# Altium PCB usbtinyisp.PcbDoc
Units mm, origin at the board's own origin, x right, y up, seen from the top; angles counter-clockwise.
Board outline 75 x 45 mm, 2 copper layers (Top Layer, Bottom Layer); 30 components, 29 nets, 117 pads, 13 vias.
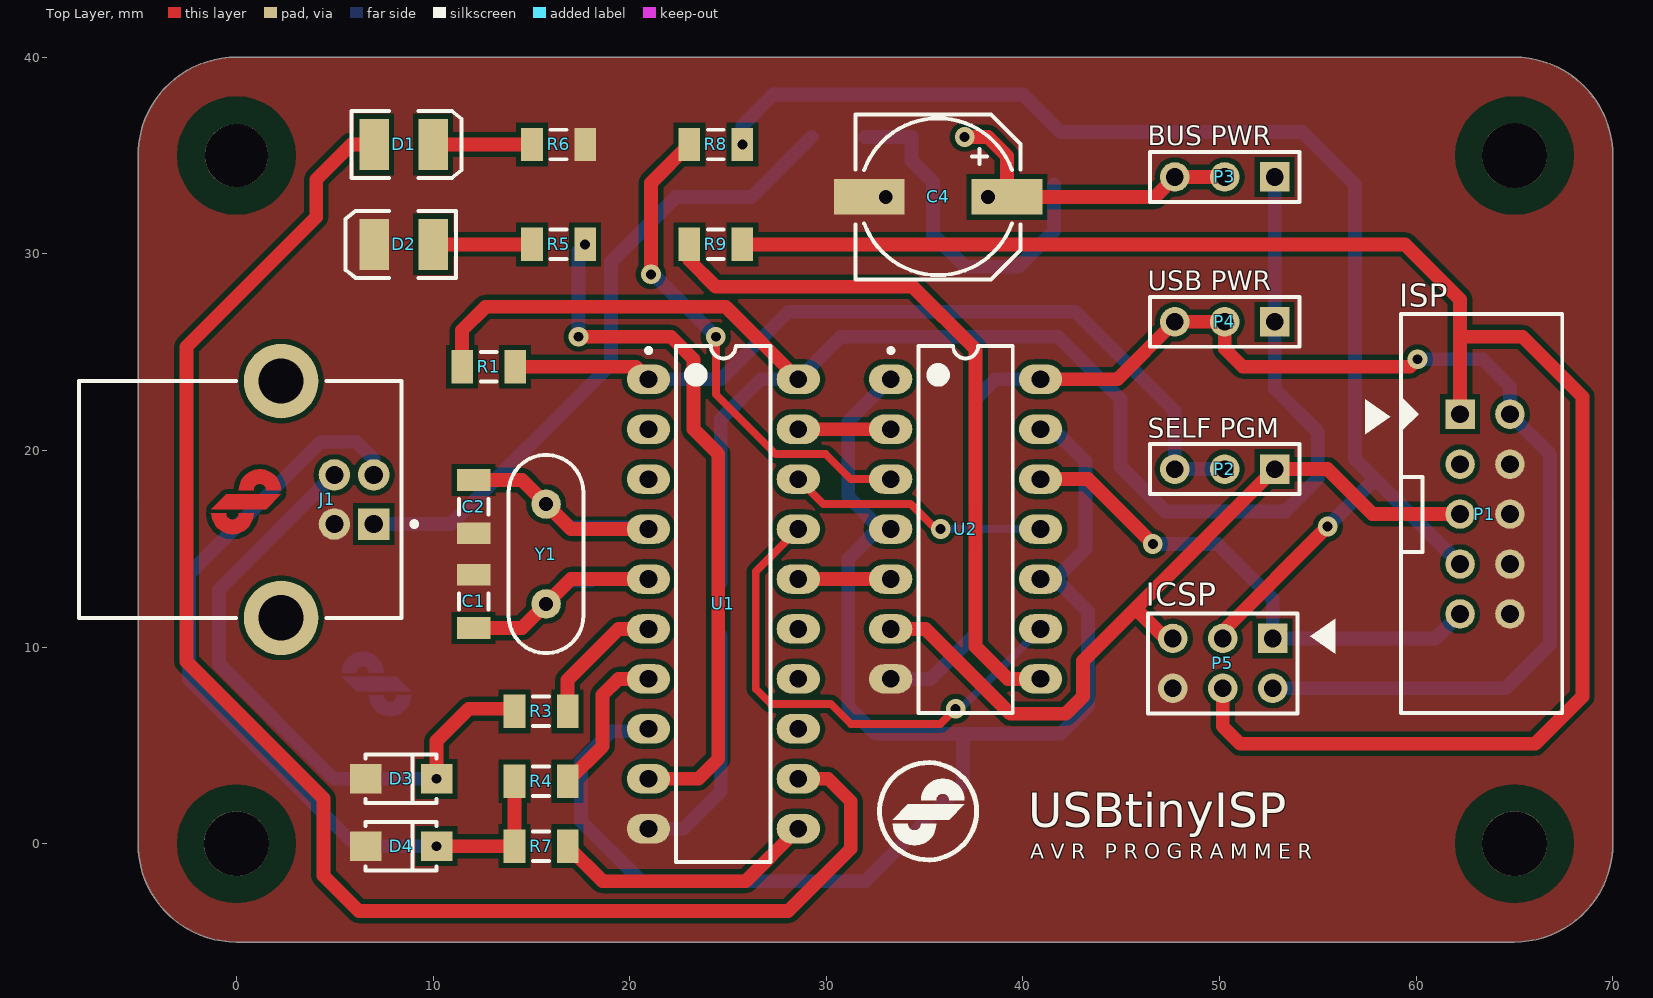
[diagram p0: Top Layer view]
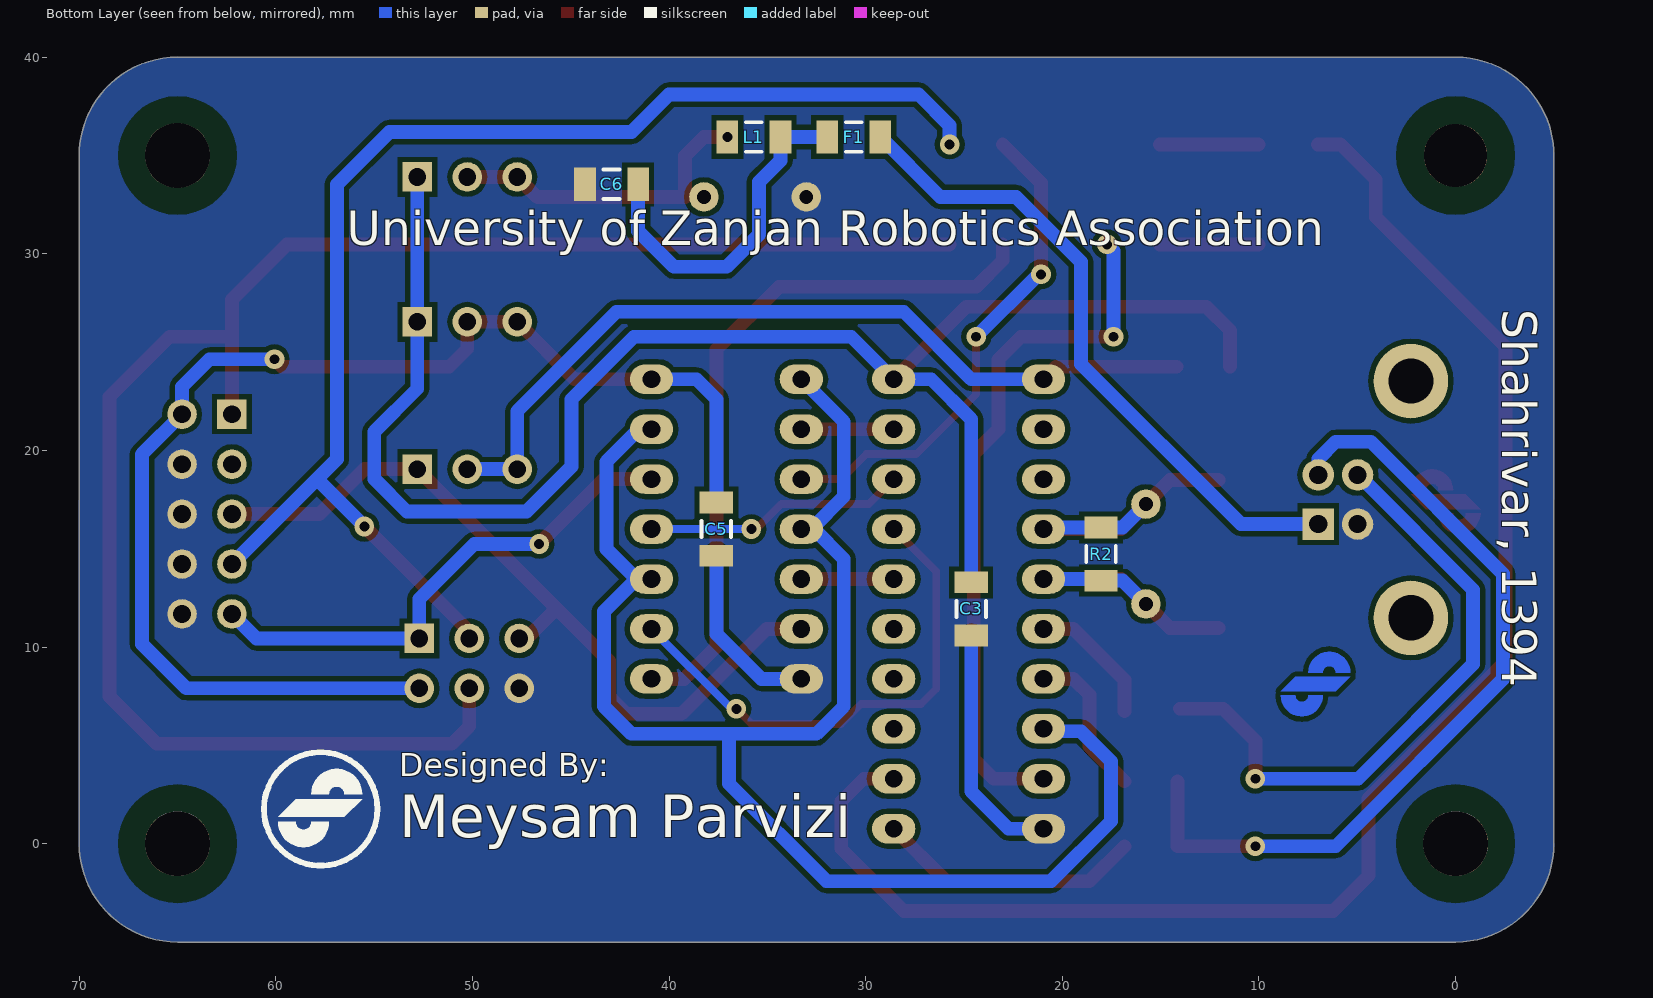
[diagram p1: Bottom Layer view, seen from below]

## Layer stack, top to bottom
Top Solder: solder mask 0.0102, Solder Resist, Dk 3.5
Top Layer: signal copper 0.0356
Dielectric 1: dielectric 0.32, FR-4, Dk 4.8
Bottom Layer: signal copper 0.0356
Bottom Solder: solder mask 0.0102, Solder Resist, Dk 3.5

## Board outline
-5,0 -5,35 cw(c0,35) 0,40 65,40 cw(c65,35) 70,35 70,0 cw(c65,0) 65,-5 0,-5 cw(c0,0)

## Design rules (kind name [scope] priority, off if disabled: settings)
Clearance [All] p1: gap=0.254
PolygonConnect [All] p1: connectstyle=Direct reliefconductorwidth=0.254 reliefentries=4 polygonreliefangle="90 Angle" airgapwidth=0.254
RoutingVias [All] p1: holewidth=0.711 width=1.27 viastyle="Through Hole" minholewidth=0.711 minwidth=1.27 maxholewidth=0.711 maxwidth=1.27
SolderMaskExpansion [All] p1: expansion=0.102
Width [All] p1: maxlimit=1 minlimit=0.254 preferedwidth=0.7 minimp=50.000000 maximp=50.000000 favimp=50.000000
30 further rules are at their usual default settings.

## Components (designator, comment, footprint, x,y, rotation, side; value= is the part's Value field where it differs from the comment)
C1 "Cap" C1206 12.065,12.319 r270 top
C2 "Cap" C1206 12.065,17.145 r90 top
C3 "Cap" C1206 24.638,11.938 r90 bottom
C4 "Cap Pol1" CAP-SMD1 35.687,32.893 r0 top
C5 "Cap" C1206 37.592,16.002 r90 bottom
C6 "Cap" C1206 42.926,33.528 r180 bottom
D1 "LED" 3.5X2.8X1.9 8.509,35.56 r0 top
D2 "LED" 3.5X2.8X1.9 8.509,30.48 r180 top
D3 "3.6v" DIODE-S 8.382,3.302 r0 top
D4 "3.6v" DIODE-S 8.382,-0.127 r0 top
F1 "Fuse 1" C1206 30.607,35.941 r180 bottom
J1 "440119-1" 440119 5.985,17.506 r180 top
L1 "Inductor" C1206 35.687,35.941 r180 bottom
P1 "ISP" BOX2X5 62.23,21.844 r270 top
P2 "Self Prog" HDR1X3 52.805,19.05 r180 top
P3 "Bus Power" HDR1X3 52.805,33.909 r180 top
P4 "USB Power" HDR1X3 52.805,26.543 r180 top
P5 "Header 3X2" HDR2X3 52.705,10.441 r180 top
R1 "Res1" C1206 12.827,24.257 r180 top
R2 "Res1" C1206 18.034,14.732 r270 bottom
R3 "Res1" C1206 15.494,6.731 r0 top
R4 "Res1" C1206 15.494,3.175 r0 top
R5 "Res1" C1206 16.383,30.48 r180 top
R6 "Res1" C1206 16.383,35.56 r0 top
R7 "Res1" C1206 15.494,-0.127 r0 top
R8 "Res1" C1206 24.384,35.56 r0 top
R9 "Res1" C1206 24.384,30.48 r0 top
U1 "ATtiny2313V-10PU" DIP20 24.765,21.082 r270 top
U2 "SN74AHC125N" DIP14 37.084,21.082 r270 top
Y1 "XTAL" XTAL 15.748,14.732 r90 top

## Footprints (in the part's own frame and the unit in brackets; to place one, negate y for a bottom-side part, rotate by r counter-clockwise, add the part's x,y. Pads: shape width x height; smd on the part's side, far side on the other; paste and mask are expansions set on the pad)
3.5X2.8X1.9 [mm] "SM LED; 2 C-Bend Leads; Body 3.5 x 2.8 x 1.9 mm, inc leads (LxWxH typ)"
  rect 1.5x2.6 smd: 1(-1.5,0) 2(1.5,0)
  silkscreen extent -2.65,-1.7 2.95,1.7
440119 [mm] "Connector; USB1.1, Type B, Thru-Hole; 4 Position; Right Angle"
  rect 1.6x1.6 hole 0.92: 1(-1,1.25)
  round 1.6 hole 0.92: 2(-1,-1.25) 3(1,-1.25) 4(1,1.25)
  round 3.8 hole 2.3: 5(3.71,6.02) 6(3.71,-6.02)
  silkscreen extent -3.18,-6.02 13.99,6.02
BOX2X5 [mm] "Box Header; 5x2 Position"
  rect 1.5x1.5 hole 0.9: 1(0,0)
  round 1.5 hole 0.9: 2(0,2.54) 3(2.54,0) 4(2.54,2.54) 5(5.08,0) 6(5.08,2.54) 7(7.62,0) 8(7.62,2.54) 9(10.16,0) 10(10.16,2.54)
  silkscreen extent -5.1,-3 15.2,5.2, body extent -5.1,-3 15.2,5.2, height 9
C1206 [mm] "Chip Capacitor, Body 3.2x1.6mm, IPC High Density"
  rect 1.1x1.7 smd: 1(-1.35,0) 2(1.35,0)
  silkscreen extent -0.4,-0.75 0.4,0.75, body extent -1.7,-0.9 1.7,0.9, height 1.3
CAP-SMD1 [mm] "SMD Electrolyte Capacitor; 2 Leads; 100uF; 25V"
  rect 3.6x1.8 smd: 1(3.5,0) 2(-3.5,0)
  silkscreen extent -4.2,-4.2 4.2,4.2
DIODE-S [mm] "SOD-123; 2 Leads; Body 2.7 x 1.6 mm, (LxW)"
  rect 1.6x1.5 smd: 1(-1.8,0) 2(1.8,0)
  silkscreen extent -1.81,-1.23 1.81,1.23
DIP14 [mm] "DIP; 14 Leads; Row Spacing 7.62 mm; Pitch 2.54 mm"
  oval 1.5x2.2 hole 0.9: 1(-2.54,-3.81) 2(0,-3.81) 3(2.54,-3.81) 4(5.08,-3.81) 5(7.62,-3.81) 6(10.16,-3.81) 7(12.7,-3.81) 8(12.7,3.81) 9(10.16,3.81) 10(7.62,3.81) 11(5.08,3.81) 12(2.54,3.81) 13(0,3.81) 14(-2.54,3.81)
  silkscreen extent -4.23,-3.9 14.43,2.4, body extent -4.2,-3.4 14.35,3.4, height 4.5
DIP20 [mm] "DIP; 20 Leads; Row Spacing 7.62 mm; Pitch 2.54 mm"
  oval 1.5x2.2 hole 0.9: 1(-2.54,-3.81) 2(0,-3.81) 3(2.54,-3.81) 4(5.08,-3.81) 5(7.62,-3.81) 6(10.16,-3.81) 7(12.7,-3.81) 8(15.24,-3.81) 9(17.78,-3.81) 10(20.32,-3.81) 11(20.32,3.81) 12(17.78,3.81) 13(15.24,3.81) 14(12.7,3.81) 15(10.16,3.81) 16(7.62,3.81) 17(5.08,3.81) 18(2.54,3.81) 19(0,3.81) 20(-2.54,3.81)
  silkscreen extent -4.23,-3.9 22.02,2.4, body extent -4.2,-3.4 22.05,3.4, height 4.5
HDR1X3 [mm] "Connector; Header; 3 Position"
  rect 1.5x1.5 hole 0.9: 1(0,0)
  round 1.5 hole 0.9: 2(2.54,0) 3(5.08,0)
  silkscreen extent -1.27,-1.27 6.35,1.27
HDR2X3 [mm] "Connector; Header; 3x2 Position"
  rect 1.5x1.5 hole 0.9: 1(0,0)
  round 1.5 hole 0.9: 2(0,2.54) 3(2.54,0) 4(2.54,2.54) 5(5.08,0) 6(5.08,2.54)
  silkscreen extent -1.27,-1.27 6.35,3.81
XTAL [mm] "Crystal, Thru Hole, 2 Leads"
  round 1.5 hole 0.7: 1(-2.54,0) 2(2.54,0)
  silkscreen extent -5.04,-1.91 5.04,1.91

## Part data
C1 C2 C3 C5 C6: "Capacitor"
C4: "Polarized Capacitor (Radial)"
D1 D2: "Typical RED GaAs LED"
D3 D4: library part "D Zener", "Zener Diode"
F1: "Fuse"
J1: "USB 1.1, Right Angle, Thru-Hole, B Type, Receptacle, 4 Position, Beige"
P1: library part "Box 5X2", "Box, 5-Pin, Dual row"
P2 P3 P4: library part "Header 3", "Header, 3-Pin"
P5: "Header, 3-Pin, Dual row"
R1 R2 R3 R4 R5 R6 R7 R8 R9: "Resistor"
U1: "Low Power tinyAVR® 8-Bit Microcontroller, 2K Flash Memory, 10MHz, Industrial Temperature, 20-Lead PDIP, Pb-Free"
U2: "Quadruple Bus Buffer Gate with 3-State Outputs"
Y1: "Crystal Oscillator"

## Free pads (board coordinates)
  round 3.2 hole 3.2: 0(0,0) 0(0,35) 0(65,0)
  round 3.3 hole 3.3: 0(0,0) 0(65,0) 0(65,35)
  round 1.5 hole 0.7: 0(38.227,32.893) 1(33.02,32.893)

## Via types
v1: diameter 1, hole 0.5, Top Layer to Bottom Layer, 13 vias

## Nets (pads, with @x,y where several pads share a name; then routed paths per layer and width w, separated by ;. In a path a pad name is that pad's centre, name@x,y a point inside that pad or via, vN(x,y) a via of type N, cw(c..) or ccw(c..) an arc to the next point about the centre after c; other vN are vias at no path point)
CONTROL: U1.8 U2.1 U2.4 U2.10 U2.13 | length 82
  Bottom Layer w0.7: U1.8 20.828,5.715 19.05,5.715 17.526,4.191 17.526,1.143 20.574,-1.905 32.004,-1.905 36.957,3.048 36.957,5.588 ; U2.4 U2.4@32.766,16.002 ; U2.1 31.115,21.463 31.115,17.653 U2.4@32.766,16.002 ; U2.13 41.529,21.082 43.18,19.431 43.18,14.986 41.656,13.462 43.307,11.811 43.307,6.985 41.91,5.588 36.957,5.588 ; U2.4@32.766,16.002 32.639,16.002 31.115,14.478 31.115,6.985 32.512,5.588 36.957,5.588
GND: C1.1 C2.1 C3.1 C4.2 C5.1 C6.1 D2.2 D3.1 D4.1 J1.4 P1.4 P1.6 P1.8 P1.10 P5.6 pad.1 R6.2 U1.10 U2.7 | length 21.8
  Bottom Layer w0.7: U1.10 22.733,0.762 24.638,2.667 C3.1 ; U2.7 35.306,8.382 37.592,10.668 37.592,14.271 C5.1@37.592,14.779
ISP_VCC: C5.2 P1.2 P4.2 P4.3 P5.2 U2.14 | length 65.4
  Top Layer w0.7: U2.14 44.804,23.622 P4.3 P4.2 50.265,25.173 51.181,24.257 59.69,24.257 v1(60.071,24.638)
  Bottom Layer w0.7: C5.2@37.592,17.479 37.592,22.606 38.608,23.622 U2.14 ; P5.2 64.543,7.901 66.802,10.16 66.802,19.812 P1.2 64.77,23.241 63.373,24.638 v1(60.071,24.638)
MISO: P1.9 P5.1 U2.12 | length 26.4
  Top Layer w0.7: U2.12 43.307,18.542 v1(46.609,15.24)
  Bottom Layer w0.7: v1(46.609,15.24) 49.911,15.24 52.705,12.446 P5.1 60.987,10.441 P1.9
MISO2: U1.18 U2.11 | length 13.4
  Top Layer w0.4: U1.18 29.845,17.272 34.29,17.272 35.56,16.002 v1(35.814,16.002)
  Bottom Layer w0.4: v1(35.814,16.002) U2.11
MOSI: P1.1 P5.4 R9.2 | length 87.8
  Top Layer w0.7: R9.2 59.436,30.48 62.23,27.686 62.23,25.781 ; P5.4 50.165,5.969 51.054,5.08 66.04,5.08 68.453,7.493 68.453,22.733 65.405,25.781 62.23,25.781 ; P1.1 62.23,25.781
MOSI2: U1.17 U2.9 | length 26
  Top Layer w0.4: U1.17 26.416,13.843 26.416,7.874 27.178,7.112 30.226,7.112 31.242,6.096 35.814,6.096 v1(36.576,6.858)
  Bottom Layer w0.4: v1@36.83,6.858 U2.9
NetC1_2: C1.2 R2.2 U1.5 Y1.1 | length 15.5
  Top Layer w0.7: C1.2 14.525,10.969 Y1.1 17.018,13.462 U1.5
  Bottom Layer w0.7: Y1.1 16.938,13.382 R2.2 ; R2.2@18.114,13.462 U1.5
NetC2_2: C2.2 R2.1 U1.4 Y1.2 | length 15.5
  Top Layer w0.7: C2.2 14.525,18.495 Y1.2 17.018,16.002 U1.4
  Bottom Layer w0.7: Y1.2 16.938,16.082 R2.1 U1.4@20.875,16.082
NetC4_1: C4.1 L1.1 P3.2 P3.3 pad.0@38.227,32.893 | length 16.1
  Top Layer w0.7: v1(37.037,35.941) 38.227,35.941 39.187,34.981 C4.1 46.709,32.893 P3.3 P3.2
NetC6_2: C6.2 F1.1 L1.2 | length 17.7
  Bottom Layer w0.7: F1.1 L1.2 34.337,34.751 35.433,33.655 35.433,30.988 37.084,29.337 39.751,29.337 41.576,31.162 C6.2
NetD1_1: D1.1 U1.12 | length 79.1
  Top Layer w0.7: D1.1 5.842,35.56 4.064,33.782 4.064,31.877 -2.54,25.273 -2.54,9.271 4.426,2.305 4.426,-1.632 6.223,-3.429 28.067,-3.429 31.242,-0.254 31.242,2.159 30.099,3.302 U1.12
NetD1_2: D1.2 R6.1 | length 5
  Top Layer w0.7: D1.2 R6.1
NetD2_1: D2.1 R5.2 | length 5
  Top Layer w0.7: D2.1 R5.2
NetD3_2: D3.2 J1.3 R3.1 | length 32
  Top Layer w0.7: v1(10.182,3.302) 10.182,5.229 11.811,6.858 R3.1@14.017,6.858
  Bottom Layer w0.7: J1.3@4.969,18.776 -0.889,12.918 -0.889,9.144 4.953,3.302 v1(10.182,3.302)
NetD4_2: D4.2 J1.2 R4.1 R7.1 | length 42
  Top Layer w0.7: v1(10.182,-0.127) R7.1 R4.1
  Bottom Layer w0.7: J1.2@6.969,18.776 6.969,19.574 6.096,20.447 4.318,20.447 -2.413,13.716 -2.413,8.382 6.096,-0.127 v1(10.182,-0.127)
NetF1_2: F1.2 J1.1 | length 33.5
  Bottom Layer w0.7: J1.1 10.922,16.256 19.05,24.384 19.05,29.591 22.352,32.893 26.209,32.893 F1.2
NetR3_2: R3.2 U1.6 | length 6.8
  Top Layer w0.7: R3.2 16.844,8.335 19.431,10.922 U1.6
NetR4_2: R4.2 U1.7 | length 7.8
  Top Layer w0.7: R4.2 18.622,4.953 18.622,7.573 19.431,8.382 U1.7
NetR5_1: R5.1 U1.9 | length 36
  Top Layer w0.7: v1(17.399,25.781) 22.098,25.781 23.241,24.638 23.241,21.082 24.511,19.812 24.511,4.318 23.495,3.302 U1.9
  Bottom Layer w0.7: v1(17.399,25.781) 17.399,30.146 v1(17.733,30.48)
NetR7_2: R7.2 U1.11 | length 13.6
  Top Layer w0.7: R7.2 18.622,-1.905 25.908,-1.905 U1.11
NetR8_1: R8.1 U2.3 | length 25.6
  Top Layer w0.4: v1(24.384,25.781) 24.384,22.86 27.432,19.812 29.972,19.812 31.242,18.542 U2.3
  Top Layer w0.7: v1(21.082,28.956) 21.082,33.608 R8.1
  Bottom Layer w0.7: v1(21.082,28.956) 21.209,28.956 v1(24.384,25.781)
NetR9_1: R9.1 U2.8 | length 36.3
  Top Layer w0.7: R9.1 23.034,29.671 24.384,28.321 34.417,28.321 37.592,25.146 37.592,10.033 39.243,8.382 U2.8
RESET: P2.2 P2.3 R1.1 U1.1 | length 42.8
  Top Layer w0.7: R1.1 20.32,24.257 U1.1
  Bottom Layer w0.7: U1.1 24.638,23.622 28.067,27.051 42.672,27.051 47.725,21.998 P2.3 P2.2
RST: P1.5 P2.1 P5.5 U2.6 | length 40.6
  Top Layer w0.7: U2.6 35.052,10.922 39.37,6.604 42.164,6.604 43.053,7.493 43.053,9.298 45.72,11.965 ; P5.5@47.625,10.568 P5.5 47.244,10.441 45.72,11.965 ; P1.5 57.785,16.764 55.499,19.05 P2.1 45.72,11.965
RST2: U1.16 U2.5 | length 4.7
  Top Layer w0.7: U1.16 U2.5
SCK: P1.7 P5.3 R8.2 | length 67.5
  Top Layer w0.7: P5.3 50.165,10.795 v1(55.499,16.129)
  Bottom Layer w0.7: v1(25.734,35.56) 25.734,36.529 27.305,38.1 40.005,38.1 41.91,36.195 54.229,36.195 56.896,33.528 56.896,19.558 57.912,18.542 ; v1(55.499,16.129) 57.912,18.542 ; P1.7 57.912,18.542
SCK2: U1.19 U2.2 | length 4.7
  Top Layer w0.7: U1.19 U2.2
VCC: C3.2 P3.1 P4.1 R1.2 U1.20 | length 84
  Top Layer w0.7: R1.2 11.477,26.115 12.667,27.305 24.892,27.305 U1.20
  Bottom Layer w0.7: C3.2 24.638,21.59 26.67,23.622 U1.20 30.734,25.781 41.783,25.781 44.958,22.606 44.958,19.177 47.244,16.891 53.34,16.891 54.991,18.542 54.991,20.955 52.805,23.141 P4.1 P3.1
pads on no net: J1.5 J1.6 P1.3 U1.2 U1.3 U1.13 U1.14 U1.15

## Polygon pours and split planes (outlines as drawn)
GND on Top Layer "Mechanical 1-No Net" (solid, pour order 2): -5,0 -5,35 cw(c0,35) 0,40 65,40 cw(c65,35) 70,35 70,0 cw(c65,0) 65,-5 0,-5 cw(c0,0)
GND on Bottom Layer "Mechanical 1-No Net" (solid, pour order 4): -5,0 -5,35 cw(c0,35) 0,40 65,40 cw(c65,35) 70,35 70,0 cw(c65,0) 65,-5 0,-5 cw(c0,0)

## Other copper
Top Layer:
  region: 2.266,17.762 1.522,17.018 -1.268,17.018 -0.524,17.762
  pour cut-out: 3.009,0 cw(c0,0) 0,-3.009 cw(c0,0) -3.009,0 cw(c0,0) 0,3.009 cw(c0,0)
  pour cut-out: 65,3.009 cw(c65,0) 68.009,0 cw(c65,0) 65,-3.009 cw(c65,0) 61.991,0 cw(c65,0)
  pour cut-out: 61.991,35 cw(c65,35) 65,38.009 cw(c65,35) 68.009,35 cw(c65,35) 65,31.991 cw(c65,35)
  pour cut-out: 0,31.991 cw(c0,35) -3.009,35 cw(c0,35) 0,38.009 cw(c0,35) 3.009,35 cw(c0,35)
  region: -1.267,16.809 ccw(c-0.198,16.809) 0.871,16.809 0.128,16.809 cw(c-0.198,16.809) -0.523,16.809
  region: 2.265,17.971 ccw(c1.196,17.971) 0.126,17.971 0.87,17.971 cw(c1.196,17.971) 1.521,17.971
Bottom Layer:
  region: 5.354,8.491 6.098,7.747 8.888,7.747 8.144,8.491
  pour cut-out: 3.009,0 cw(c0,0) 0,-3.009 cw(c0,0) -3.009,0 cw(c0,0) 0,3.009 cw(c0,0)
  pour cut-out: 65,3.009 cw(c65,0) 68.009,0 cw(c65,0) 65,-3.009 cw(c65,0) 61.991,0 cw(c65,0)
  pour cut-out: 61.991,35 cw(c65,35) 65,38.009 cw(c65,35) 68.009,35 cw(c65,35) 65,31.991 cw(c65,35)
  pour cut-out: 0,31.991 cw(c0,35) -3.009,35 cw(c0,35) 0,38.009 cw(c0,35) 3.009,35 cw(c0,35)
  region: 5.355,8.7 cw(c6.424,8.7) 7.494,8.7 6.75,8.7 ccw(c6.424,8.7) 6.099,8.7
  region: 8.887,7.538 cw(c7.818,7.538) 6.749,7.538 7.492,7.538 ccw(c7.818,7.538) 8.143,7.538

## Silkscreen, mask and mechanical layers (free items; w line width, h text height)
Top Overlay:
  circle w0.255: c35.179,1.651 r2.468
  region: 57.404,20.828 58.674,21.717 57.404,22.606
  region: 37.027,1.995 36.259,1.226 33.378,1.226 34.146,1.995
  region: 55.88,11.43 54.61,10.541 55.88,9.652
  region: 33.378,1.01 ccw(c34.483,1.01) 35.587,1.01 34.819,1.01 cw(c34.483,1.01) 34.147,1.01
  region: 37.026,2.211 ccw(c35.922,2.211) 34.818,2.211 35.586,2.211 cw(c35.922,2.211) 36.258,2.211
  text "BUS PWR" at 46.355,35.179 h1.7
  text "USB PWR" at 46.355,27.813 h1.7
  text "ISP" at 59.13,26.924 h2
  text "SELF PGM" at 46.355,20.32 h1.7
  text "ICSP" at 46.255,11.711 h2
  text "USBtinyISP" at 40.259,0.254 h3
  text "A V R   P R O G R A M M E R" at 40.386,-1.016 h1.3
Bottom Overlay:
  circle w0.298: c57.719,1.766 r2.887
  region: 59.88,1.364 58.982,2.263 55.612,2.263 56.511,1.364
  region: 59.88,1.112 cw(c58.588,1.112) 57.296,1.112 58.195,1.112 ccw(c58.588,1.112) 58.981,1.112
  region: 55.613,2.516 cw(c56.905,2.516) 58.196,2.516 57.298,2.516 ccw(c56.905,2.516) 56.512,2.516
  text "University of Zanjan Robotics Association" at 56.388,29.845 h3
  text "Shahrivar, 1394" at -1.778,27.178 h3 r90
  text "Designed By:" at 53.721,3.048 h2
  text "Meysam Parvizi" at 53.721,-0.381 h3.7
Mechanical 1:
  the board outline again, w0.2